# EAGLE board IoT_temp_sensor (EAGLE 9.6.2)
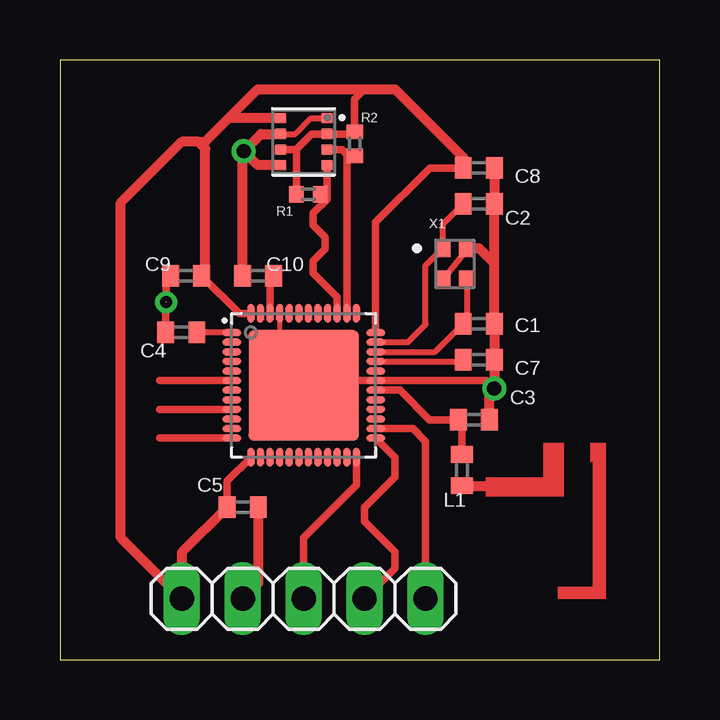
[diagram p0: board, top side]
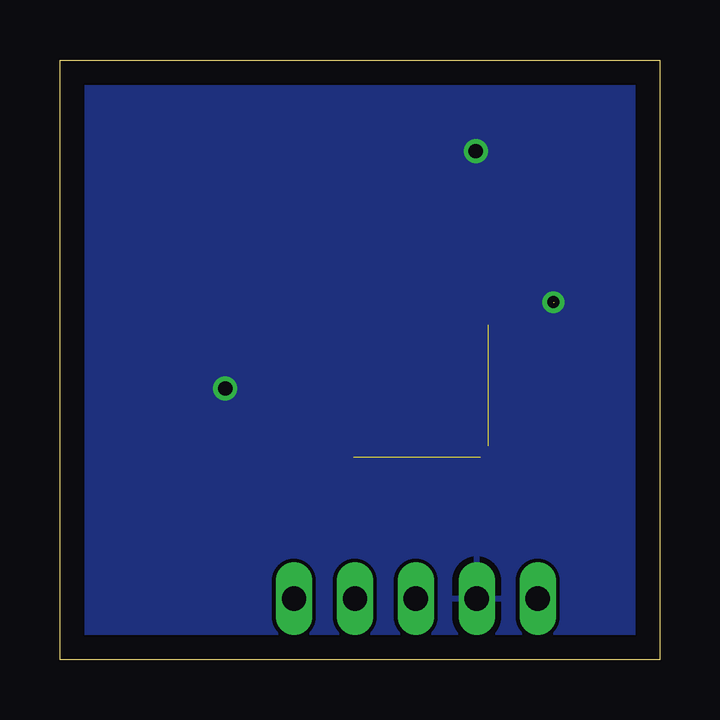
[diagram p1: board, bottom side, seen from below]

Size 25 x 25 mm. Coordinates in mm from the lower left corner, seen from the top.
Outline: 0,0 25,0 25,25 0,25 0,0
Copper layers (1*16): Top 0.035mm / dielectric 1.5mm / Bottom 0.035mm
Design rules "default *": minimum track width 6mil, minimum drill 0.35mm, track to track 6mil, track to pad 6mil, pad to pad 6mil, via to via 6mil, smd to smd 6mil, copper to edge 40mil, drill to drill 6mil, minimum pad ring 10mil, minimum via ring 8mil, stop-mask expansion 4mil, vias tented up to drill 0mil, thermal gap 10mil

## Footprints (pad centres in the part's own frame; a part is rotated, then mirrored left to right if it is on the bottom)
C0402 = smd 0.7 x 0.9: 1 -0.65,0; 2 0.65,0
1X05 = drill 1.016 long: 1 -5.08,0; 2 -2.54,0; 3 0,0; 4 2.54,0; 5 5.08,0
R0402 = smd 0.6 x 0.7: 1 -0.5,0; 2 0.5,0
QFN40P600X600X90-49N = smd 0.8 x 0.3: 1 -3,2.2; 2 -3,1.8; 3 -3,1.4; 4 -3,1; 5 -3,0.6; 6 -3,0.2; 7 -3,-0.2; 8 -3,-0.6; 9 -3,-1; 10 -3,-1.4; 11 -3,-1.8; 12 -3,-2.2; 25 3,-2.2; 26 3,-1.8; 27 3,-1.4; 28 3,-1; 29 3,-0.6; 30 3,-0.2; 31 3,0.2; 32 3,0.6; 33 3,1; 34 3,1.4; 35 3,1.8; 36 3,2.2 | smd 0.3 x 0.8: 13 -2.2,-3; 14 -1.8,-3; 15 -1.4,-3; 16 -1,-3; 17 -0.6,-3; 18 -0.2,-3; 19 0.2,-3; 20 0.6,-3; 21 1,-3; 22 1.4,-3; 23 1.8,-3; 24 2.2,-3; 37 2.2,3; 38 1.8,3; 39 1.4,3; 40 1,3; 41 0.6,3; 42 0.2,3; 43 -0.2,3; 44 -0.6,3; 45 -1,3; 46 -1.4,3; 47 -1.8,3; 48 -2.2,3 | smd 4.6 x 4.6: 49 0,0
PSON65P250X250X100-8N = smd 0.49 x 0.45: 1 0.97,0.975; 2 0.97,0.325; 3 0.97,-0.325; 4 0.97,-0.975; 5 -0.97,-0.975; 6 -0.97,-0.325; 7 -0.97,0.325; 8 -0.97,0.975
XTAL_ABM11-24.000MHZ-D2X-T3 = smd 0.65 x 0.75: 1 -0.5,0.65; 2 -0.5,-0.65; 3 0.5,-0.65; 4 0.5,0.65

## Placement (x,y rotation side)
C1  12pF  [C0402]  17.46,14 180 top
C2  12pF  [C0402]  17.46,19 180 top
C3  0.8pF  [C0402]  17.26,10 0 top
C4  100nF  [C0402]  5.06,13.65 180 top
C5  100nF  [C0402]  7.62,6.35 0 top
C7  100pF  [C0402]  17.46,12.5 0 top
C8  100nF  [C0402]  17.46,20.5 0 top
C9  4.7uF  [C0402]  5.26,16 180 top
C10  1uF  [C0402]  8.26,16 180 top
JP2  [1X05]  10.16,2.54 0 top
L1  3.9nH  [C0402]  16.76,7.9 270 top
R1  4.7K  [R0402]  10.36,19.4 180 top
R2  4.7K  [R0402]  12.29,21.5 90 top
U1  NRF52832-QFAA-R  [QFN40P600X600X90-49N]  10.16,11.43 0 top
U2  BME280  [PSON65P250X250X100-8N]  10.16,21.59 0 top
X1  JXS21-WA  [XTAL_ABM11-24.000MHZ-D2X-T3]  16.46,16.5 0 top

## Library data of the parts
C1-C5 C7-C10 L1 = rcl; SPICEPREFIX: C
JP2 = pinhead
R1 R2 = rcl; SPICEPREFIX: R
U1 = NRF52832-QFAA-R; AVAILABILITY: In Stock; DESCRIPTION: IC RF TxRx + MCU Bluetooth, General ISM > 1GHz ANT, Bluetooth v5.0 2.4GHz 48-VFQFN Exposed Pad; MF: Nordic; MP: NRF52832-QFAA-R; PACKAGE: VFQFN-48 Nordic Semiconductor; PRICE: None; PURCHASE-URL: https://pricing.snapeda.com/search/part/NRF52832-QFAA-R/?ref=eda
U2 = BME280; AVAILABILITY: In Stock; DESCRIPTION: Board Mount Humidity Sensors MEMS humidity, pressure and temperature sensor; MF: Bosch; MP: BME280; PACKAGE: LGA-8 Bosch; PRICE: None; PURCHASE-URL: https://pricing.snapeda.com/search/part/BME280/?ref=eda
X1 = JXS21-WA; AVAILABILITY: In Stock; DESCRIPTION: CERAMICS SMD ULTRA MINIATURE QUARTZ CRYSTAL; MF: Abracon LLC; MP: ABM11-24.000MHZ-D2X-T3; PACKAGE: None; PRICE: None; PURCHASE-URL: https://pricing.snapeda.com/search/part/ABM11-24.000MHZ-D2X-T3/?ref=eda

## Nets
DCC: U1.47
DEC2: U1.32
GND: C1.1 C2.1 C3.2 C4.2 C5.2 C7.2 C8.2 C9.2 C10.2 JP2.2 U1.31 U1.45 U1.49 U2.1 U2.5 U2.7 X1.2 X1.4
N$1: L1.2
N$2: C2.2 U1.35 X1.1
N$3: U1.12
N$4: C7.1 U1.33
N$5: C3.1 L1.1 U1.30
N$6: C10.1 U1.46
N$7: C4.1 U1.1
N$8: U1.9
N$9: C1.2 U1.34 X1.3
N$10: U1.6
RESET: JP2.3 U1.24
SCL: R1.1 U1.39 U2.4
SDA: R2.1 U1.38 U2.3
SWDCLK: JP2.4 U1.25
SWDIO: JP2.5 U1.26
VDD: C5.1 C8.1 C9.1 JP2.1 R1.2 R2.2 U1.13 U1.36 U1.48 U2.2 U2.6 U2.8

## Tracks (layer width: path | path; a pad name or v marks a point on that pad's centre or on a via)
ALIGN  (2 unrouted)
  Top 0.127: 7.16,14.3 7.16,13.95 | 7.16,8.9 7.16,8.43 7.46,8.43 | 12.76,8.43 13.16,8.43 13.16,8.7
GND  (via drill 0.5, 0.6)  (1 unrouted)
  Top 0.2: U1.45 9.16,12.43 U1.49
  Top 0.254: U2.1 10.45,22.57 9.8,21.91 U2.7 | X1.4 16.96,17.1 X1.2
  Top 0.305: C4.2 4.41,14.88 | U1.49 10.36,11.63 U1.31 17.78,11.63 v18.11,11.3 | v4.43,14.9 4.43,15.82 C9.2
  Top 0.406: C8.2 C2.1 18.11,16.51 | 18.11,16.51 C1.1 C7.2 v18.11,11.3 17.91,11.1 C3.2 | C5.2 8.27,3.19 JP2.2 | X1.4 17.47,17.15 18.11,16.51 | v7.66,21.2 | U2.5 8.25,20.61 v7.66,21.2 | v7.66,21.2 8.38,21.91 U2.7 | C10.2 7.61,21.15 v7.66,21.2
  pour Bottom: 0,25 0,0 25,0 25,25
N$1
  Top 0.406: L1.2 17.78,7.25
N$2
  Top 0.254: U1.35 14.5,13.23 15.24,13.97 15.24,16.43 X1.1 15.96,18.15 C2.2
N$3
  Top 0.305: U1.12 4.16,9.23
N$4
  Top 0.254: U1.33 16.74,12.43 C7.1
N$5
  Top 0.305: U1.30 14.17,11.23 15.4,10 C3.1 16.76,9.95 L1.1
N$6
  Top 0.305: U1.46 8.76,15.85 C10.1
N$7
  Top 0.254: U1.1 5.71,13.63 C4.1
N$8
  Top 0.305: U1.9 4.16,10.43
N$9
  Top 0.254: C1.2 16.76,14.05 | U1.34 15.64,12.83 C1.2 | X1.3 16.96,14.15 C1.2
N$10
  Top 0.305: U1.6 4.16,11.63
RESET
  Top 0.305: U1.24 12.36,7.28 10.16,5.08 JP2.3
SCL
  Top 0.305: U1.39 11.56,15.11 10.56,16.11 10.56,16.61 11.06,17.11 11.06,17.61 10.56,18.11 10.56,18.61 11.13,19.18 | U2.4 11.13,19.18 | R1.1 10.91,19.4 11.13,19.18
SDA
  Top 0.305: U1.38 11.96,21.06 | U2.3 11.75,21.27 11.96,21.06 | R2.1 12.02,21 11.96,21.06
SWDCLK
  Top 0.305: U1.25 13.97,8.42 13.97,7.62 12.7,6.35 12.7,5.77 13.97,4.5 13.97,3.81 JP2.4
SWDIO
  Top 0.305: U1.26 14.71,9.63 15.24,9.1 JP2.5
VDD
  Top 0.305: U1.36 13.16,18.24 15.42,20.5 C8.1 | U1.13 6.97,7.44 C5.1 | U2.6 9.84,21.27 9.86,21.29 | 9.86,21.29 10.48,21.91 U2.2 12.2,21.91 R2.2 12.29,23.37 12.7,23.78 | R1.2 9.86,21.29 | U1.48 7.48,14.43 C9.1 6.06,16.14
  Top 0.406: C5.1 5.08,4.46 JP2.1 2.54,5.08 2.54,19.05 5.08,21.59 5.76,21.59 | 16.34,21.41 13.97,23.78 12.7,23.78 8.25,23.78 7.03,22.57 | 16.34,21.41 16.81,20.94 C8.1 | 5.76,21.59 6.06,21.59 7.03,22.57 | U2.8 7.03,22.57 | 6.06,16.14 6.06,21.3 5.76,21.59 | 16.34,21.41
(copper drawn outside any net)
  shapes: Top area x5